# Altium PCB PCB.PcbDoc
Units mm, origin at the board's own origin, x right, y up, seen from the top; angles counter-clockwise.
Board outline 59 x 41 mm, 4 copper layers (Top Layer, (GND), (PWR), Bottom Layer), stack 1.369 mm thick; 36 components, 27 nets, 101 pads, 14 vias.
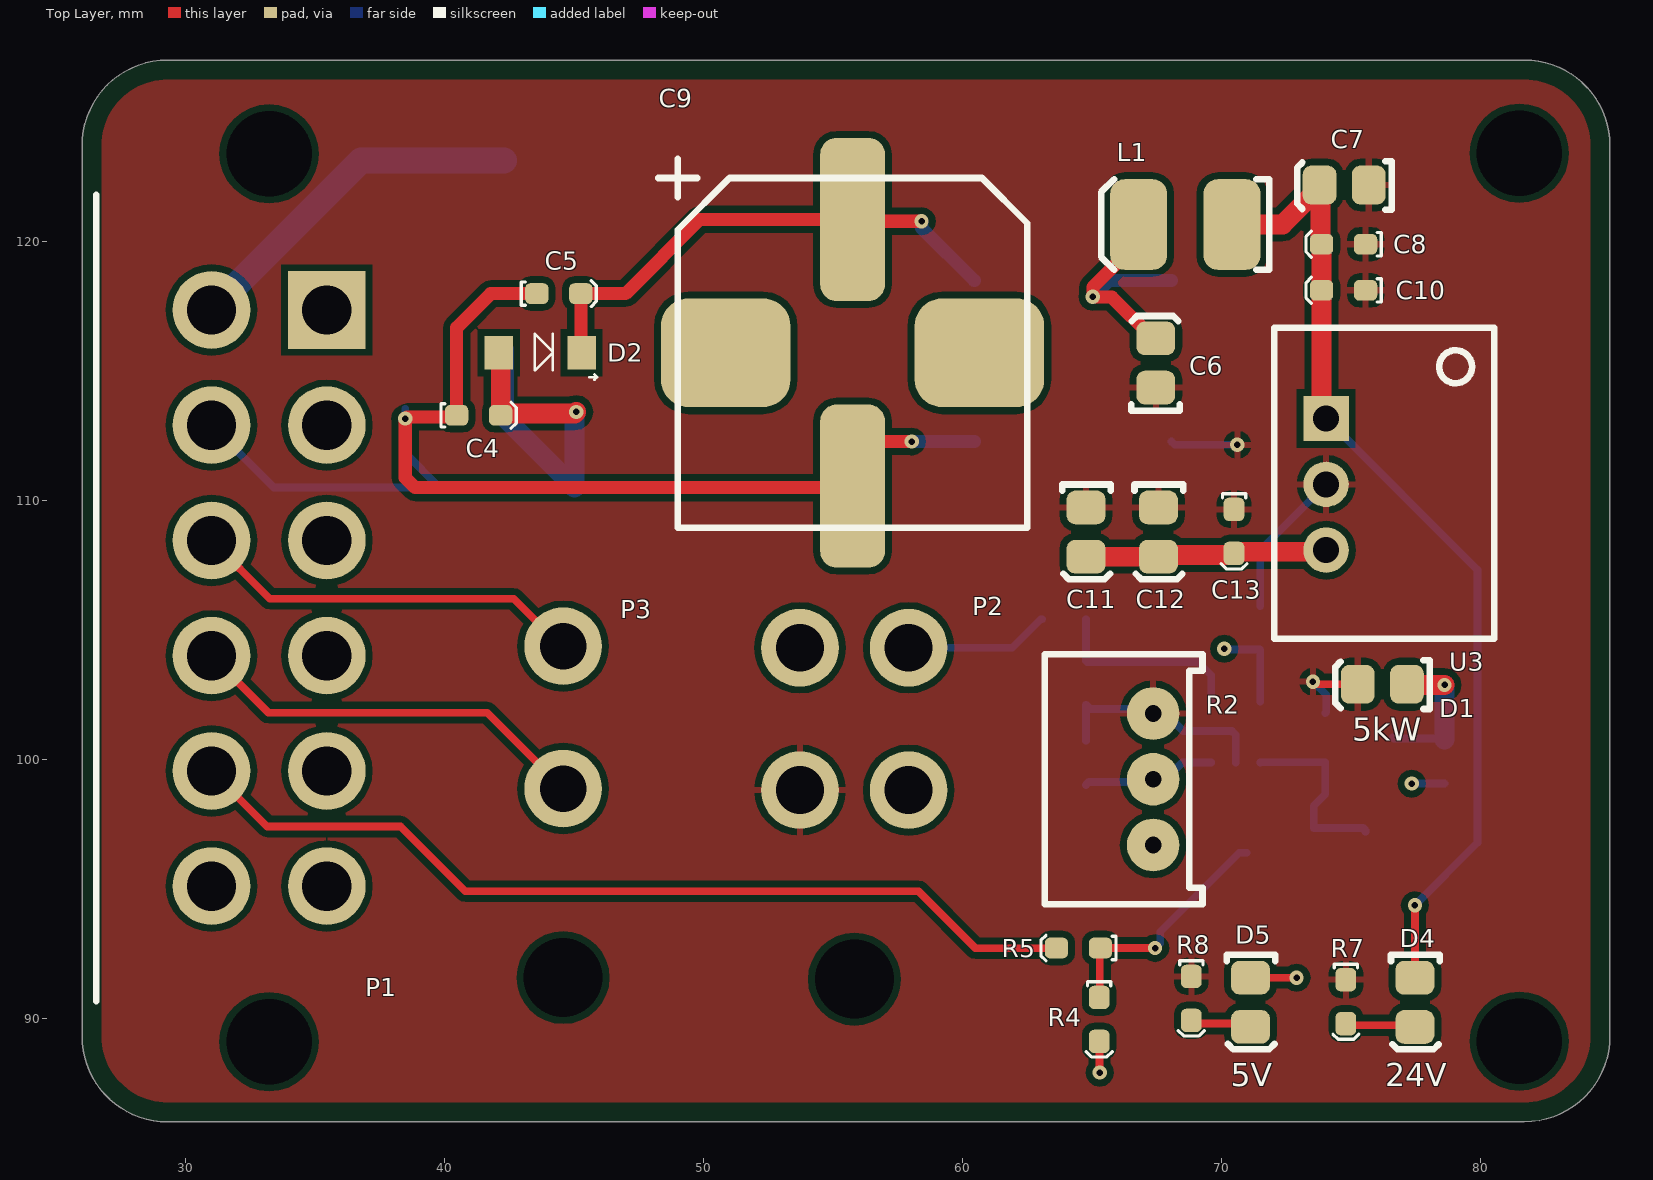
[diagram p0: Top Layer view]
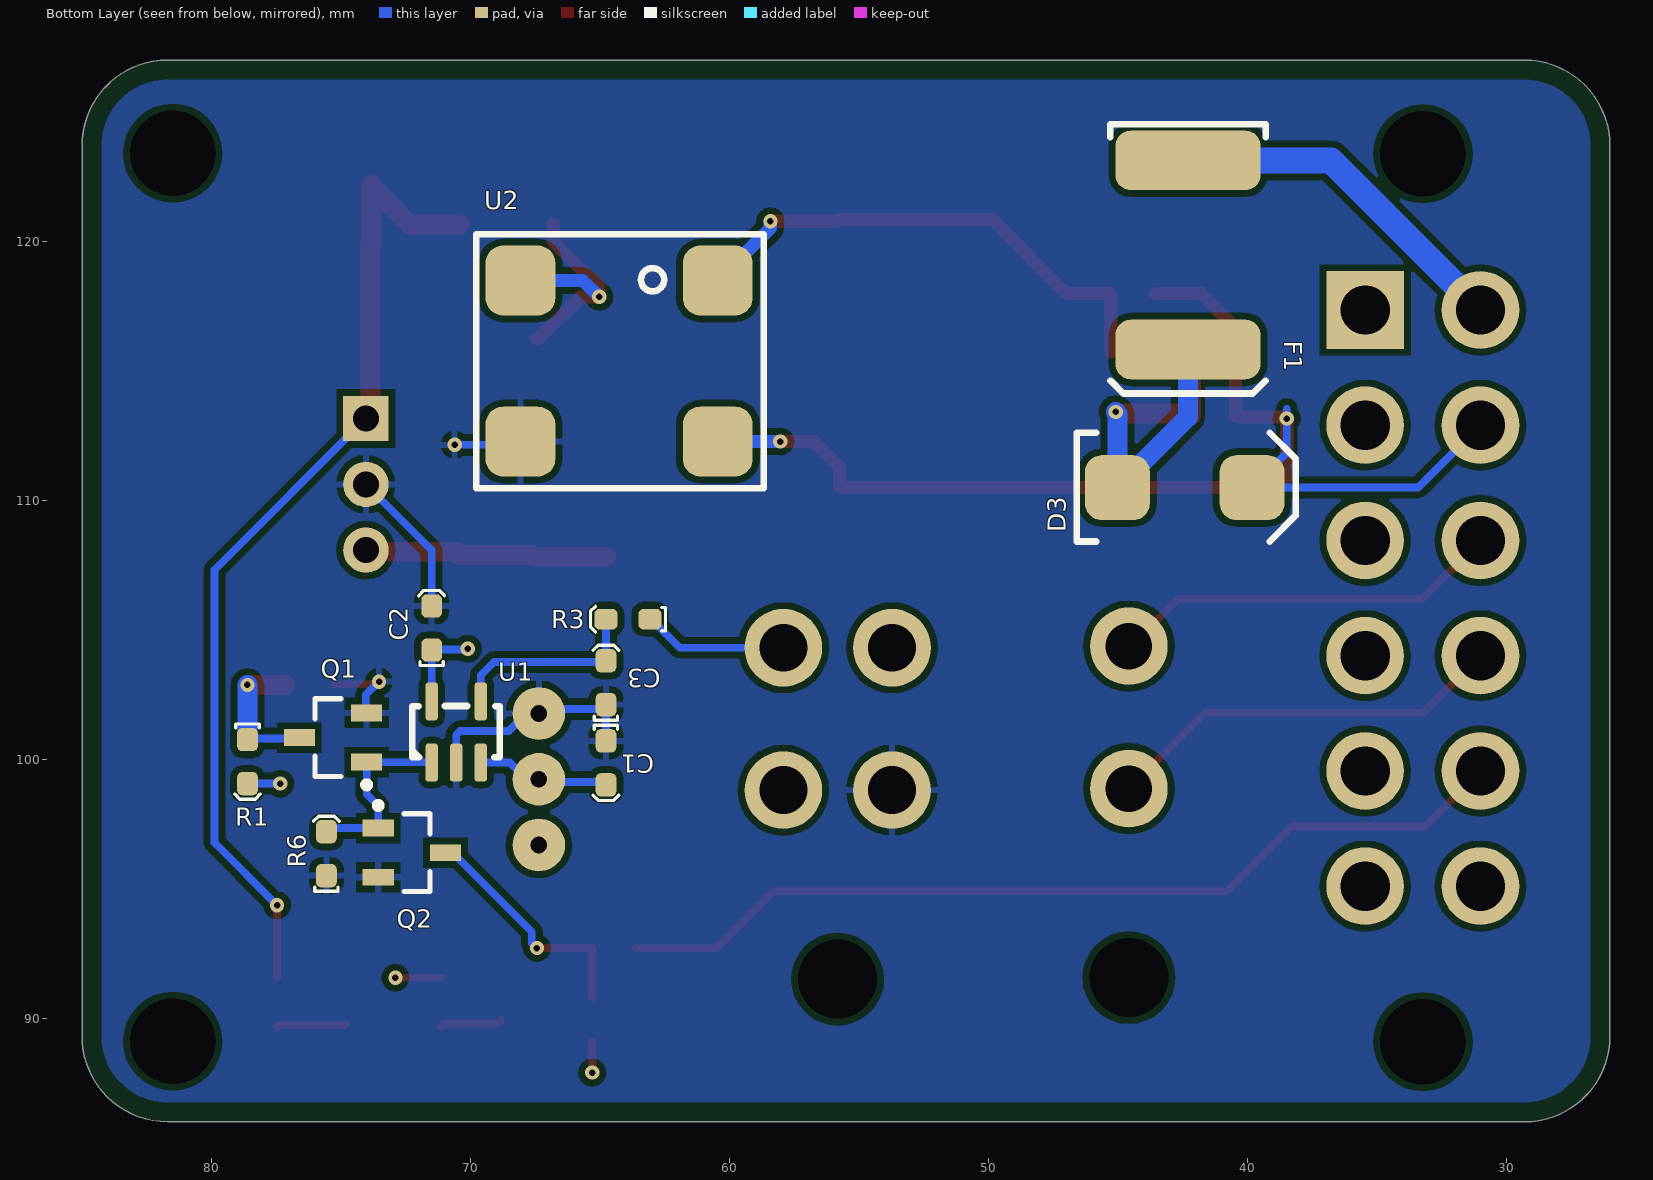
[diagram p1: Bottom Layer view, seen from below]
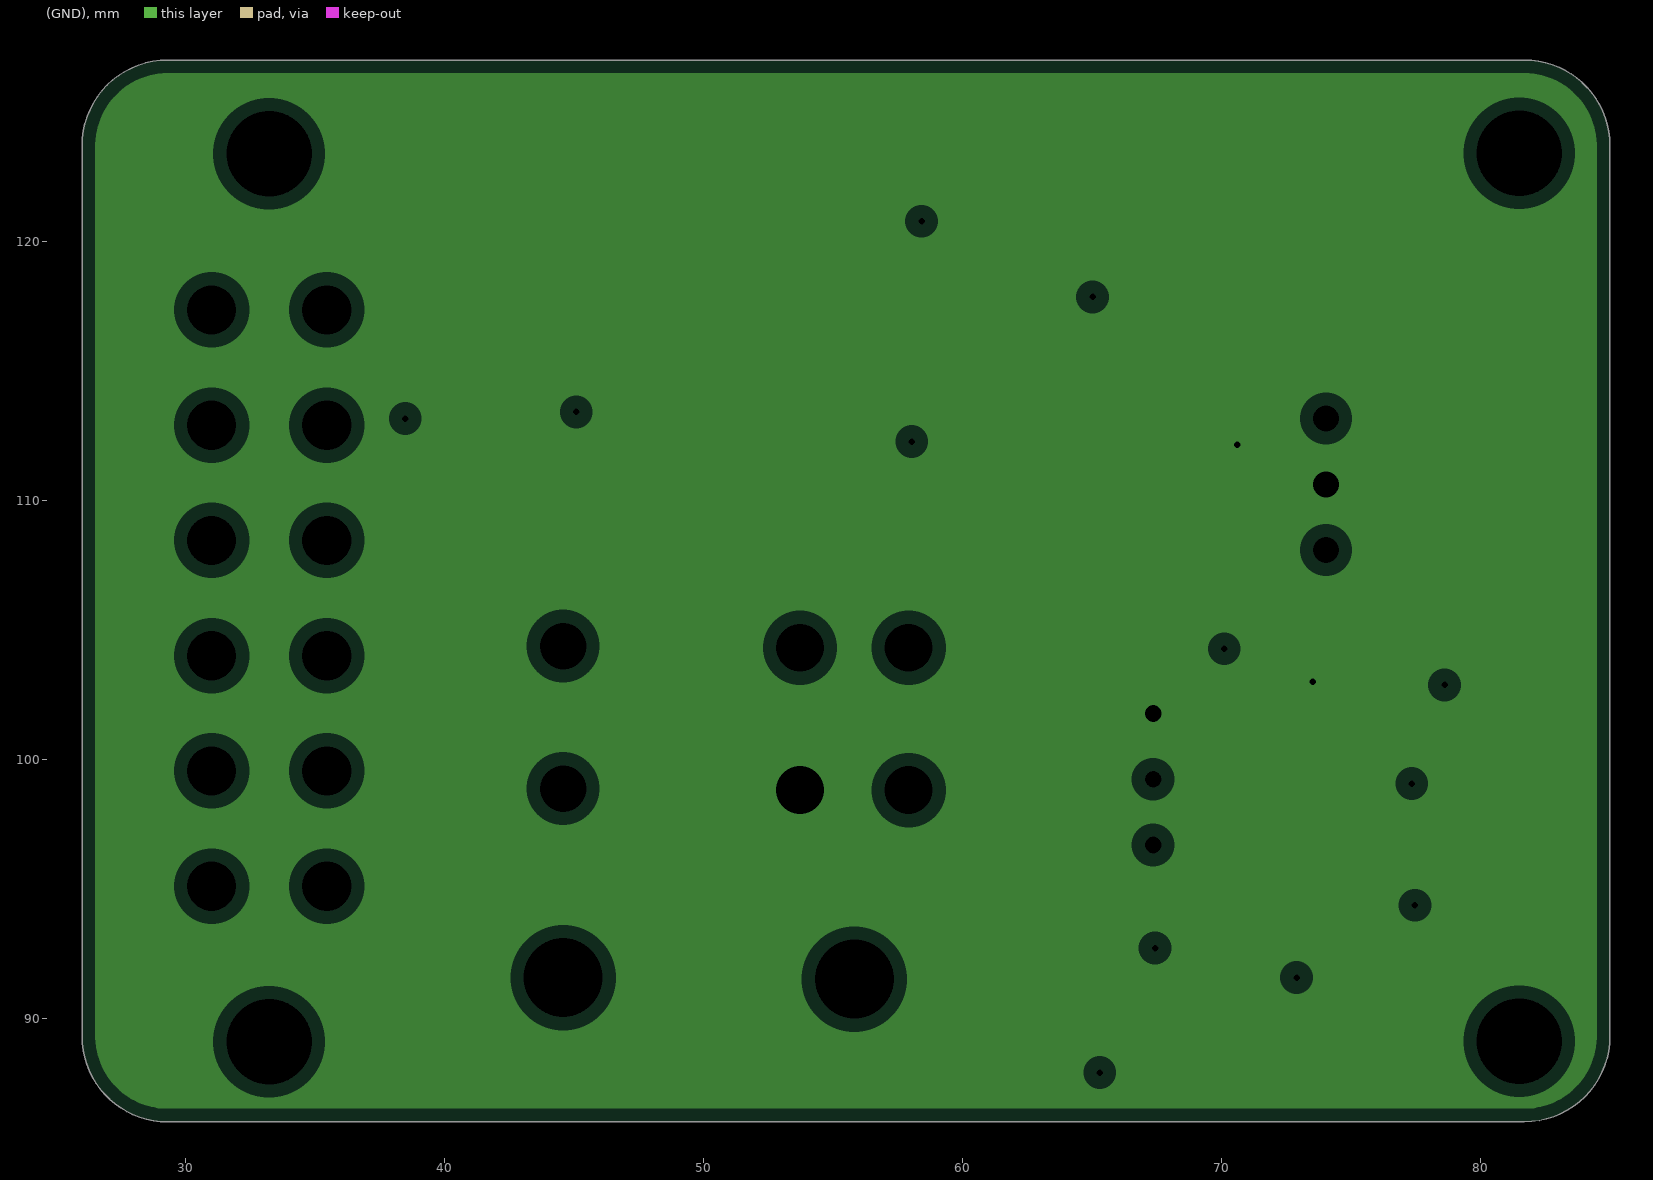
[diagram p2: (GND), clearances drawn from the general rule]
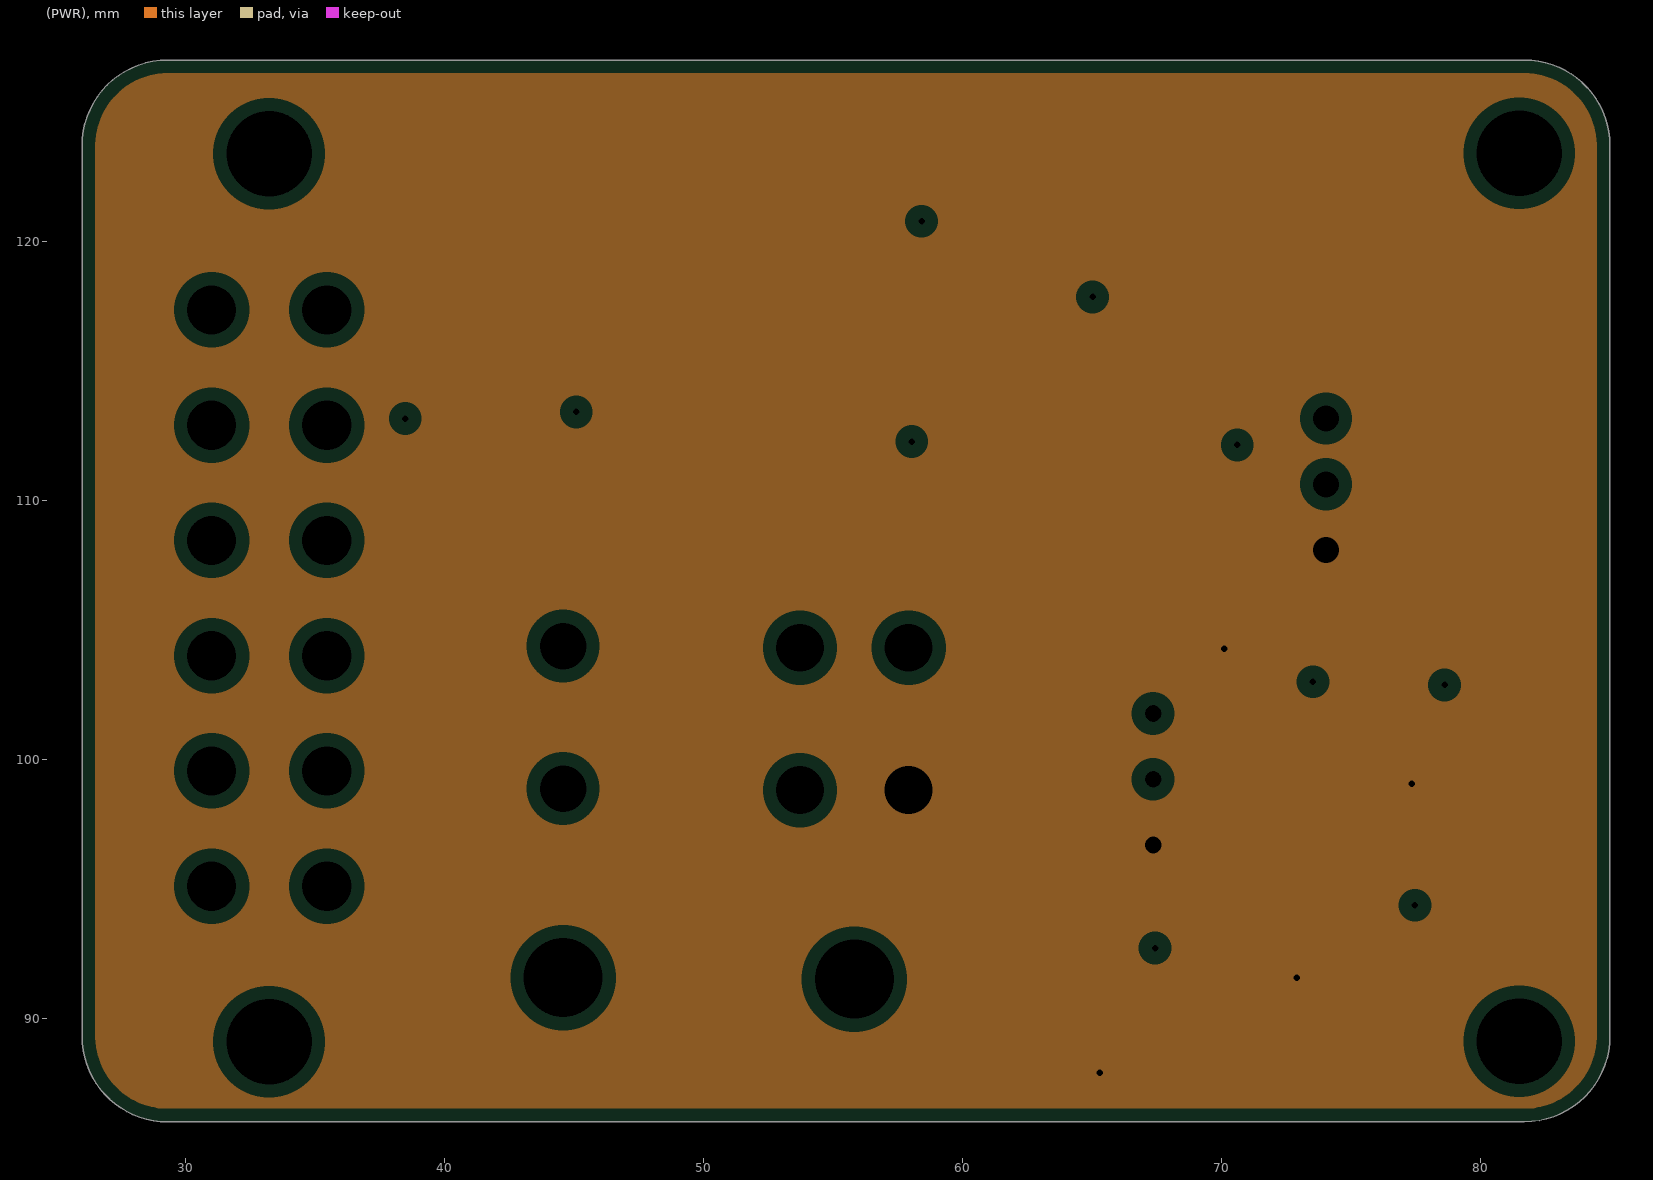
[diagram p3: (PWR), clearances drawn from the general rule]

## Layer stack, top to bottom
Top Solder: solder mask 0.0254, SM-001, Dk 4
Top Layer: signal copper 0.035
Dielectric 1: prepreg 0.1295, PP-017, Dk 4.3
Dielectric 2: prepreg 0.1295, PP-017, Dk 4.3
(GND): plane copper 0.035, net 0V
Dielectric 3: core 0.7112, Core-039, Dk 4.8
(PWR): plane copper 0.035, net 5V
Dielectric 4: prepreg 0.1295, PP-017, Dk 4.3
Dielectric 5: prepreg 0.1295, PP-017, Dk 4.3
Bottom Layer: signal copper 0.035
Bottom Solder: solder mask 0.0254, SM-001, Dk 4

## Board outline
29.3,86 cw(c29.3,89.3) 26,89.3 26,123.7 cw(c29.3,123.7) 29.3,127 81.7,127 cw(c81.7,123.7) 85,123.7 85,89.3 cw(c81.7,89.3) 81.7,86

## Design rules (kind name [scope] priority, off if disabled: settings)
BoardOutlineClearance [All] p1: gap=0.75 ignorepadtopadclearanceinfootprint=FALSE
Clearance [All] p1: gap=0.254 ignorepadtopadclearanceinfootprint=FALSE except(0: Arc-Hole Track-Hole SMDPad-Hole THPad-Hole Via-Hole Fill-Hole Poly-Hole Region-Hole Text-Hole)
HoleSize [All] p1: absolutevalues=TRUE maxlimit=4 minlimit=0.025 maxpercent=80.000 minpercent=20.000
PlaneClearance [All] p1: clearance=0.508
PlaneConnect [All] p1: planeconnectstyle=Relief reliefexpansion=0.508 reliefentries=4 reliefconductorwidth=0.254 reliefairgap=0.254
PolygonConnect [All] p1: connectstyle=Relief reliefconductorwidth=0.254 reliefentries=4 polygonreliefangle="90 Angle" airgapwidth=0.254
RoutingVias [All] p1: holewidth=0.25 width=0.55 viastyle="Through Hole" minholewidth=0.2 minwidth=0.5 maxholewidth=0.711 maxwidth=1.27
SolderMaskExpansion [All] p1: expansion=0.102 istentingtop=FALSE
Width [All] p1: maxlimit=1.27 minlimit=0.3 preferedwidth=0.3 minimp=50.000000 maximp=50.000000 favimp=50.000000
27 further rules are at their usual default settings.

## Classes and differential pairs
component class "U_Power supply": C4 C5 C6 C7 C8 C9 C10 C11 C12 C13 D2 D3 D4 D5 F1 L1 R7 R8 U2 U3
component class TopLevel: C1 C2 C3 D1 P1 P2 P3 Q1 Q2 R1 R2 R3 R4 R5 R6 U1

## Components (designator, comment, footprint, x,y, rotation, side; value= is the part's Value field where it differs from the comment)
C1 "100nF" 0603 64.77,100.711 r270 bottom
C2 "100nF" 0603 71.501,104.218 r90 bottom
C3 "10nF" 0603 64.77,102.108 r90 bottom
C4 "100nF" 0603 40.464,113.284 r0 top
C5 "100nF" 0603 43.561,117.983 r0 top
C6 "10uF" 0805 67.437,115.316 r90 top
C7 "10uF" 0805 74.725,122.148 r180 top
C8 "100nF" 0603 75.565,119.888 r180 top
C9 "220uF" "Vishay Radial 1213" 55.753,115.697 r90 top
C10 "100nF" 0603 75.565,118.11 r180 top
C11 "22uF" 0805 64.796,108.761 r270 top
C12 "1µF" 0805 67.59,108.761 r270 top
C13 "100nF" 0603 70.485,109.65 r270 top
D1 "Yellow" "0805 LED" 76.2,102.87 r180 top
D2 "PMEG100T10ELR-QX" "NXP SOD123W" 43.688,115.697 r180 top
D3 "SM6T36CAY" "ST SMB DIODE" 42.418,110.49 r0 bottom
D4 "Red" "0805 LED" 77.496,90.6 r270 top
D5 "Red" "0805 LED" 71.146,90.605 r270 top
F1 "0ZCF0100AF2A" 2920 42.291,123.124 r270 bottom
L1 "12uH" 1812 68.602,120.65 r180 top
P1 "DTF13-12P" DTF13-12P 31,106.236 r270 top
P2 "39300040" 39300040 57.921,98.806 r0 top
P3 "39300020" 39300020 44.577,98.867 r0 top
Q1 "SQ2308CES-T1_GE3" "VSHY SOT-23-3" 75.311,100.838 r0 bottom
Q2 "SQ2308CES-T1_GE3" "VSHY SOT-23-3" 72.263,96.393 r180 bottom
R1 "2K" 0603 78.613,100.76 r270 bottom
R2 "10K (Var)" "B 3296" 66.802,99.314 r90 top
R3 "10k" 0603 63.07,105.41 r0 bottom
R4 "1k" 0603 65.278,90.805 r270 top
R5 "1k" 0603 65.327,92.71 r180 top
R6 "20K" 0603 75.565,95.504 r90 bottom
R7 "20K" 0603 74.803,91.489 r270 top
R8 "2K" 0603 68.834,91.616 r270 top
U1 "TLV7031-Q1" "TI SOT-23-5" 71.501,99.873 r180 bottom
U2 "744272121" "Wurth 4-PC Pad" 68.072,112.268 r180 bottom value="120uH @ 100kHz"
U3 "R-78C5.0-1.0" "RECOM 3-SIP" 74.041,113.157 r270 top

## Footprints (in the part's own frame and the unit in brackets; to place one, negate y for a bottom-side part, rotate by r counter-clockwise, add the part's x,y. Pads: shape width x height; smd on the part's side, far side on the other; paste and mask are expansions set on the pad)
0603 [mm]
  rrect50% 0.9x0.8 smd: 1(0,0) 2(1.7,0)
  silkscreen extent -0.6,-0.5 2.3,0.5, body extent 0.05,-0.42 1.65,0.43, height 0.6
0805 [mm]
  rrect50% 1.3x1.5 smd: 1(-0.962,-0.026) 2(0.938,-0.026)
  silkscreen extent -1.85,-0.95 1.8,0.93, body extent -1,-0.65 1,0.66, height 0.73
"0805 LED" [mm]
  rrect50% 1.3x1.5 smd: A(-0.962,-0.026) K(0.938,-0.026)
  silkscreen extent -1.85,-0.95 1.8,0.93, body extent -1.1,-0.62 0.9,0.62, height 1
1812 [mm]
  rrect50% 2.2x3.5 smd: 1(-1.8,0) 2(1.8,0)
  silkscreen extent -3.25,-1.75 3.25,1.75, body extent -2.25,-1.6 2.25,1.6, height 2.5
2920 [mm]
  rrect50% 2.3x5.6 smd: 1(0,0) 2(7.3,0)
  silkscreen extent -1.4,-3 9,3, body extent -0.34,-2.81 7.64,2.81, height 1.14
39300020 [mm]
  round 3 hole 1.8: 1(0,0) 2(0,5.5)
  round 1.524 hole 3.05: ""(0,-7.3)
  body extent -2.7,-13.97 3.1,5.97, height 11.4
39300040 [mm]
  round 3 hole 1.85: 1(0,0) 2(0,5.5) 3(-4.2,0) 4(-4.2,5.5)
  round 1.524 hole 3.05: ""(-2.1,-7.3)
  body extent -6.9,-13.87 3.1,6.07, height 11.4
"B 3296" [mil]
  round 80 hole 25.2: 1(-103.39,-22) 2(-3.39,-22) 3(96.61,-22)
  silkscreen extent -193,-97 187,143, body extent -191,-97 184,143, height 455
DTF13-12P [mm]
  round 3 hole 3.3 unplated: 0(-17.145,2.22) 0(17.145,2.22)
  rect 3x3 hole 1.9: 1(-11.114,4.45)
  round 3 hole 1.9: 2(-6.664,4.45) 3(-2.214,4.45) 4(2.236,4.45) 5(6.686,4.45) 6(11.136,4.45) 7(11.136,0) 8(6.686,0) 9(2.236,0) 10(-2.214,0) 11(-6.664,0) 12(-11.114,0)
  silkscreen extent -15.56,-4.45 15.59,-4.45, body extent -20.79,-27.74 20.79,6.55, height 23.13
"NXP SOD123W" [mm]
  rect 1.1x1.3 smd: A(1.6,0) K(-1.6,0)
  silkscreen extent -2.2,-0.73 0.2,1.04, body extent -1.75,-0.95 1.75,0.95, height 1.1
"RECOM 3-SIP" [mm] "12 to 42 Vdc In, 9 Vdc Out"
  rect 1.75x1.75 hole 1: 1(0,0)
  round 1.75 hole 1: 2(2.54,0) 3(5.08,0)
  silkscreen extent -3.5,-2 8.5,6.5, body extent -3.26,-2.02 8.34,6.48, height 11.41
"ST SMB DIODE" [mm]
  rrect50% 2.5x2.5 smd: A(2.6,0) K(-2.6,0)
  silkscreen extent -4.28,-2.12 4.17,2.08, body extent -2.88,-1.99 2.72,1.95, height 2.5
"TI SOT-23-5" [mil]
  rrect50% 19x58 smd: 1(0,0) 2(37.4,0) 3(74.8,0) 4(74.8,93) 5(0,93)
  silkscreen extent -30,8 103,86, body extent -23,-12 97,106, height 57
"Vishay Radial 1213" [mm]
  rrect50% 4.2x5 smd: 0(0,4.9) 0(0,-4.9)
  rrect50% 6.3x2.5 smd: 1(-5.15,0) 2(5.15,0)
  silkscreen extent -6.75,-6.75 7.5,7.5, body extent -7.45,-6.45 7.45,6.45, height 14.31
"VSHY SOT-23-3" [mm] "SOT23, 3-Leads, Body 2.92x2.37mm, Pitch 0.95mm, IPC Low Density"
  rect 1.2x0.65 smd: D(1.3,0) G(-1.3,0.95) S(-1.3,-0.95)
  silkscreen extent -1.42,-1.5 0.7,1.95, body extent -1.32,-1.52 1.32,1.52, height 1.12
"Wurth 4-PC Pad" [mm]
  rrect50% 2.7x2.7 smd: 1(7.62,6.22) 2(0,6.22) 3(0,0) 4(7.62,0)
  silkscreen extent -1.7,-1.8 9.4,8, body extent -1.19,-1.24 8.81,7.46, height 6.2

## Part data
C1 C2 C4 C5 C8 C10 C13: library part GCM188L81H104KA57D, Digikey Part Number=490-6049-1-ND, Manufacturer=muRata, Rated Voltage=50V, Temperature Rating=X8L, Tolerance=±10%, Material=MLCC, Part Number=GCM188L81H104KA57D
C3: library part GCM188L81H103KA03D, Digikey Part Number=490-GCM188L81H103KA03DCT-ND, Manufacturer=muRata, Rated Voltage=50V, Temperature Rating=X8L, Tolerance=±10%, Material=MLCC, Part Number=GCM188L81H103KA03D
C6 C7: library part GRM21BR6YA106KE43L, Digikey Part Number=490-10514-6-ND, Manufacturer=muRata, Rated Voltage=50V, Temperature Rating=X5R, Tolerance=10%, Material=MLCC, Part Number=GRM21BR6YA106KE43L
C9: library part MAL214699106E3, Digikey Part Number=4440PHCT-ND, Manufacturer=Vishay, Rated Voltage=50V, Temperature Rating=125C, Tolerance=20%, Material="Aluminium Electrolytic", Part Number=MAL214699106E3
C11: library part GRM21BR61A226ME51L, Digikey Part Number=490-10511-1-ND, Manufacturer=muRata, Rated Voltage=10V, Temperature Rating=X5R, Tolerance=20%, Material=MLCC, Part Number=GRM21BR61A226ME51L
C12: library part GCM21BR71H105KA03L, Digikey Part Number=490-10675-1-ND, Manufacturer=muRata, Rated Voltage=50V, Temperature Rating=X7R, Tolerance=±10%, Material=MLCC, Part Number=GCM21BR71H105KA03L
D1: library part SML-211YTT86, "Yellow LED Indication - Discrete 1.75V 0805 (2012 Metric)", Digikey Part Number=511-1293-1-ND, Manufacturer="ROHM Semiconductor", Colour=Yellow, Part Number=SML-211YTT86
D2: Breakdown Voltage="100 V", Digikey Part Number=1727-PMEG100T10ELR-QXCT-ND, Forward Voltage="0.75 V @ 1A", Manufacturer="Nexperia USA Inc.", Rated Power="680 mW", Part Number=PMEG100T10ELR-QX
D3: Breakdown Voltage="30.8 V", Digikey Part Number=497-10804-1-ND, Manufacturer=STMicroelectronics, Rated Power=600W, Forward Voltage="30.8 V", Part Number=SM6T36CAY
D4 D5: library part SML-210LTT86, "Red LED Indication - Discrete 1.75V 0805 (2012 Metric)", Digikey Part Number=511-1286-1-ND, Manufacturer="ROHM Semiconductor", Colour=Red, Part Number=SML-210LTT86
F1: "PTC RESET FUSE 60V 1A 292", Digikey Part Number=507-2070-1-ND, Manufacturer="Littelfuse Inc.", Digikey Link=https://www.digikey.com/product-detail/en/bel-fuse-inc/0ZCF0100AF2A/507-2070-1-ND/6210547, Part Number=0ZCF0100AF2A
L1: library part RLS-126, Digikey Part Number=945-3429-ND, Manufacturer=Recom, Rated Current="0.8 A", Tolerance=0.2, Impedance=230mOhm, Material=Wirewound, Part Number=RLS-126
P1: Digikey Part Number=1734-1861-ND, Angle=90, Contact="Copper Alloy", Digikey Link=https://www.digikey.com/products/en?keywords=dtf13-12pa, Flange=No, Part Number=DTF13-12P, Pitch=4.45mm, Positions=12, Row Spacing=4.45mm
P2: Digikey Part Number=WM21352-ND, Angle=90, Contact=Tin, Flange=No, Part Number=39300040, Pitch=4.2mm, Positions=4, Row Spacing=5.5mm
P3: Digikey Part Number=WM21351-ND, Angle=90, Contact=Tin, Flange=No, Part Number=39300020, Pitch=4.2mm, Positions=2, Row Spacing=5.5mm
Q1 Q2: "MOSFET N-CH 60V 2.3A SOT23", Digikey Part Number=SQ2308CES-T1_GE3CT-ND, Manufacturer="Vishay Siliconix", Rated Power=2W, LatestRevisionDate=29-May-2009, LatestRevisionNote="IPC-7351 Footprint Added.", PackageDescription="4-Pin SOT-343 Package 1.3 mm Pitch, 2.1 mm Lead Span", PackageReference=SOT-343, PackageVersion=Sep-2000, Part Number=SQ2308CES-T1_GE3, Published=24-Mar-1999, Publisher="Altium Limited", Type=N-channel
R1 R8: library part RC0603FR-072KL, Digikey Part Number=311-2.00KHRCT-ND, Manufacturer=YAGEO, Rated Power=0.1W, Tolerance=0.01, Part Number=RC0603FR-072KL
R2: library part 3296W-1-103LF, Digikey Part Number=3296W-103LF-ND, Manufacturer="Bournes Inc", Rated Power=0.5W, Tolerance=0.1, Part Number=3296W-1-103LF
R3: library part RC0603FR-0710KL, Digikey Part Number=311-10.0KHRCT-ND, Manufacturer=YAGEO, Rated Power=0.1W, Tolerance=0.01, Part Number=RC0603FR-0710KL
R4 R5: library part RC0603FR-071KL, Digikey Part Number=311-1.00KHRCT-ND, Manufacturer=YAGEO, Rated Power=0.1W, Tolerance=0.01, Part Number=RC0603FR-071KL
R6 R7: library part RC0603FR-0720KL, Digikey Part Number=311-20.0KHRCT-ND, Manufacturer=YAGEO, Rated Power=0.1W, Tolerance=0.01, Part Number=RC0603FR-0720KL
U1: Digikey Part Number=296-TLV7031QDBVRQ1CT-ND, Input Voltage="1.6 to 6.5 V", Manufacturer="Texas Instruments", Channels=1, Output=Push-Pull, Part Number=TLV7031-Q1
U2: Digikey Part Number=732-1489-1-ND, Manufacturer="Wurth Electronics Inc", Rated Current="2.5 A", Impedance="460 Ohms @ 30MHz", Material=Wirewound, Part Number=744272121
U3: "CONV DC/DC 1A 5V OUT SIP VERT", Digikey Part Number=945-1395-5-ND, Input Voltage="8 to 42 V", Manufacturer=Recom, Output Current="1.0 A", Output Voltage=5V, Part Number=R-78C5.0-1.0

## Free pads (board coordinates)
  round 1.524 hole 3.3: 1(81.5,89.114) 1(81.5,123.404)

## Via types
v1: diameter 0.55, hole 0.25, Top Layer to Bottom Layer, 14 vias

## Nets (pads, with @x,y where several pads share a name; then routed paths per layer and width w, separated by ;. In a path a pad name is that pad's centre, name@x,y a point inside that pad or via, vN(x,y) a via of type N, cw(c..) or ccw(c..) an arc to the next point about the centre after c; other vN are vias at no path point)
0V: C1.1 C2.2 C3.1 C6.1 C7.1 C8.1 C10.1 C11.1 C12.1 C13.1 D1.K P2.3 Q1.S Q2.S R2.3 R6.1 R7.1 R8.1 U1.2 U2.3 U3.2 | length 20.3
  Top Layer w0.3: v1(73.533,102.997) 73.613,102.997 73.714,102.896 D1.K
  Bottom Layer w0.3: C1.1 C3.1 64.94,101.938 67.191,101.938 R2.3 67.842,101.768 68.518,101.092 70.402,101.092 70.551,100.943 U1.2 ; U2.3 68.199,112.141 v1(70.612,112.141) ; C2.2 71.501,108.077 U3.2 ; v1(73.533,102.997) 74.041,102.489 74.041,101.818 Q1.S
5kW: P1.8 R5.2 | length 35.5
  Top Layer w0.3: P1.8 33.15,97.4 38.3,97.4 40.8,94.9 58.3,94.9 60.5,92.7 63.617,92.7 R5.2
5V: C2.1 C11.2 C12.2 C13.2 D5.A P2.1 R1.2 R2.1 R4.2 U1.5 U3.3 | length 17
  Top Layer w0.3: R4.2 65.289,89.094 65.289,87.911 v1(65.3,87.9) ; D5.A v1(72.898,91.567)
  Top Layer w0.762: C11.2 C12.2 67.627,107.886 70.421,107.886 C13.2 70.549,108.013 73.977,108.013 U3.3
  Bottom Layer w0.3: v1(70.104,104.267) 70.128,104.243 71.476,104.243 C2.1 U1.5 ; v1(77.343,99.06) R1.2
24V: C7.2 C8.2 C10.2 D4.A L1.1 U3.1 | length 38.2
  Top Layer w0.3: D4.A v1(77.47,94.361)
  Top Layer w0.762: L1.1 72.363,120.65 73.787,122.074 C7.2 73.826,122.135 73.826,119.927 C8.2 C10.2 73.865,113.333 U3.1
  Bottom Layer w0.3: U3.1 79.883,107.315 79.883,96.774 v1(77.47,94.361)
CAN1H: P1.5
CAN1L: P1.4
CAN2H: P1.7
CAN2L: P1.6
CAN3H: P1.3
CAN3L: P1.2
CANS: P1.1
GLV+: F1.1 P1.12 | length 13.7
  Bottom Layer w1: P1.12 36.774,123.124 F1.1
GLV-: C4.1 C5.1 C9.1 D3.K P1.11 U2.4 | length 48.1
  Top Layer w0.508: C5.1 41.783,117.983 40.464,116.664 C4.1 40.401,113.221 38.544,113.221 v1(38.481,113.157) 38.481,110.871 38.862,110.49 55.696,110.49 C9.1 55.753,111.3 56.721,112.268 v1(58.039,112.268)
  Bottom Layer w0.3: P1.11 33.41,110.49 D3.K 38.481,111.827 v1(38.481,113.157) 38.481,113.538
  Bottom Layer w0.508: v1(58.039,112.268) U2.4
"Green In": P1.10 P3.2 | length 15.3
  Top Layer w0.3: P1.10 33.25,106.2 42.672,106.2 44.505,104.367 P3.2
"Green Out": P1.9 P3.1 | length 15.7
  Top Layer w0.3: P1.9 33.2,101.8 41.644,101.8 P3.1
"High Sensitivity": P2.2 R3.1 | length 5.6
  Bottom Layer w0.3: P2.2 61.916,104.306 63.02,105.41 R3.1
"Low Sensitivity": P2.4
NetC1_2: C1.2 R2.2 U1.3 | length 5.2
  Bottom Layer w0.3: C1.2 64.878,99.119 67.252,99.119 R2.2 67.842,99.228 68.487,99.873 U1.3
NetC3_2: C3.2 R3.2 U1.4 | length 7.7
  Bottom Layer w0.3: R3.2 C3.2 64.819,103.759 69.088,103.759 69.601,103.246 U1.4
NetC4_2: C4.2 D2.A D3.A F1.2 | length 14.8
  Top Layer w0.3: C4.2 C4.2@42.227,113.347
  Top Layer w0.762: D2.A 42.164,115.621 C4.2 ; C4.2@42.227,113.347 45.021,113.347 v1(45.085,113.411)
  Bottom Layer w0.762: F1.2 42.291,113.217 D3.A 45.018,113.344 v1(45.085,113.411)
NetC5_2: C5.2 C9.2 D2.K U2.1 | length 19.8
  Top Layer w0.3: D2.K@45.261,115.724 D2.K
  Top Layer w0.508: D2.K@45.261,115.724 C5.2 46.99,117.983 49.854,120.847 C9.2 55.823,120.777 v1(58.42,120.777)
  Bottom Layer w0.508: v1(58.42,120.777) 58.428,120.769 58.428,120.512 U2.1
NetC6_2: C6.2 L1.2 U2.2 | length 9.9
  Top Layer w0.508: L1.2 66.802,120 65.032,118.23 65.032,117.864 v1(65.024,117.856) 65.032,117.848 65.769,117.848 67.363,116.254 C6.2
  Bottom Layer w0.508: v1(65.024,117.856) 65.035,117.856 65.667,118.488 U2.2
NetD1_A: D1.A Q1.D R1.1 | length 5.6
  Top Layer w0.762: D1.A 77.188,102.87 v1(78.613,102.87)
  Bottom Layer w0.3: Q1.D 76.65,100.799 78.574,100.799 R1.1
  Bottom Layer w0.762: R1.1 v1(78.613,102.87)
NetD4_K: D4.K R7.2 | length 2.7
  Top Layer w0.3: R7.2 74.867,89.725 77.406,89.725 D4.K
NetD5_K: D5.K R8.2 | length 2.4
  Top Layer w0.3: R8.2 68.958,89.792 70.996,89.792 D5.K
NetQ1_G: Q1.G Q2.G R6.2 U1.1 | length 7.3
  Bottom Layer w0.3: U1.1 71.516,99.888 Q1.G 74.011,98.649 73.563,98.201 Q2.G 75.476,97.343 75.565,97.254 R6.2
NetQ2_D: Q2.D R4.1 R5.1 | length 9.3
  Top Layer w0.3: R4.1 65.302,90.829 65.302,92.685 R5.1 v1(67.437,92.71)
  Bottom Layer w0.3: v1(67.437,92.71) 67.631,92.904 67.631,93.336 70.688,96.393 Q2.D
pads on no net: C9.0 P1.0 P2. P3.

## Polygon pours and split planes (outlines as drawn)
0V on Bottom Layer "0V_L04_P001" (solid, remove dead copper, pour order 1): 26,127 26,86 85,86 85,127
0V on Top Layer "0V_L01_P000" (solid, remove dead copper, pour order 0): 26,127 85,127 85,86 26,86
5V on (PWR) (split plane): 29.3,126.49 81.7,126.49 81.715,126.491 81.919,126.483 82.137,126.457 82.352,126.414 82.563,126.355 82.768,126.279 82.967,126.187 83.159,126.08 83.341,125.958 83.513,125.823 83.674,125.674 83.823,125.513 83.958,125.341 84.08,125.159 84.187,124.967 84.279,124.768 84.355,124.563 84.414,124.352 84.457,124.137 84.483,123.919 84.491,123.715 84.49,123.7 84.49,89.3 84.491,89.285 84.483,89.081 84.457,88.863 84.414,88.648 84.355,88.437 84.279,88.232 84.187,88.033 84.08,87.841 83.958,87.659 83.823,87.487 83.674,87.326 83.513,87.177 83.341,87.042 83.159,86.92 82.967,86.813 82.768,86.721 82.563,86.645 82.352,86.586 82.137,86.543 81.919,86.517 81.715,86.509 81.7,86.51 29.3,86.51 29.285,86.509 29.081,86.517 28.863,86.543 28.648,86.586 28.437,86.645 28.232,86.721 28.033,86.813 27.841,86.92 27.659,87.042 27.487,87.177 27.326,87.326 27.177,87.487 27.042,87.659 26.92,87.841 26.813,88.033 26.721,88.232 26.645,88.437 26.586,88.648 26.543,88.863 26.517,89.081 26.509,89.285 26.51,89.3 26.51,123.7 26.509,123.715 26.517,123.919 26.543,124.137 26.586,124.352 26.645,124.563 26.721,124.768 26.813,124.967 26.92,125.159 27.042,125.341 27.177,125.513 27.326,125.674 27.487,125.823 27.659,125.958 27.841,126.08 28.033,126.187 28.232,126.279 28.437,126.355 28.648,126.414 28.863,126.457 29.081,126.483 29.285,126.491
0V on (GND) (split plane): 29.3,126.49 81.7,126.49 81.715,126.491 81.919,126.483 82.137,126.457 82.352,126.414 82.563,126.355 82.768,126.279 82.967,126.187 83.159,126.08 83.341,125.958 83.513,125.823 83.674,125.674 83.823,125.513 83.958,125.341 84.08,125.159 84.187,124.967 84.279,124.768 84.355,124.563 84.414,124.352 84.457,124.137 84.483,123.919 84.491,123.715 84.49,123.7 84.49,89.3 84.491,89.285 84.483,89.081 84.457,88.863 84.414,88.648 84.355,88.437 84.279,88.232 84.187,88.033 84.08,87.841 83.958,87.659 83.823,87.487 83.674,87.326 83.513,87.177 83.341,87.042 83.159,86.92 82.967,86.813 82.768,86.721 82.563,86.645 82.352,86.586 82.137,86.543 81.919,86.517 81.715,86.509 81.7,86.51 29.3,86.51 29.285,86.509 29.081,86.517 28.863,86.543 28.648,86.586 28.437,86.645 28.232,86.721 28.033,86.813 27.841,86.92 27.659,87.042 27.487,87.177 27.326,87.326 27.177,87.487 27.042,87.659 26.92,87.841 26.813,88.033 26.721,88.232 26.645,88.437 26.586,88.648 26.543,88.863 26.517,89.081 26.509,89.285 26.51,89.3 26.51,123.7 26.509,123.715 26.517,123.919 26.543,124.137 26.586,124.352 26.645,124.563 26.721,124.768 26.813,124.967 26.92,125.159 27.042,125.341 27.177,125.513 27.326,125.674 27.487,125.823 27.659,125.958 27.841,126.08 28.033,126.187 28.232,126.279 28.437,126.355 28.648,126.414 28.863,126.457 29.081,126.483 29.285,126.491

## Silkscreen, mask and mechanical layers (free items; w line width, h text height)
Top Overlay:
  text "5kW" at 75.057,100.711 h0.89
  text "5V" at 70.358,87.376 h0.89
  text "24V" at 76.327,87.376 h0.89
Mechanical 1:
  the board outline again, w0.1
Drill Drawing:
  circle w0.254: c0.37,170.501 r0.508
  circle w0.254: c0.37,170.501 r0.847
  circle w0.254: c0.37,155.261 r0.847
  lines w0.254: -0.476,150.604 1.217,150.604 1.217,152.297 -0.476,152.297 -0.476,150.604 ; -0.476,158.647 -0.053,158.647 0.37,158.224 0.794,158.647 1.217,158.647 0.794,159.071 1.217,159.494 0.794,159.494 0.37,159.917 -0.053,159.494 -0.476,159.494 -0.053,159.071 -0.476,158.647 ; -0.476,162.034 1.217,162.034 1.217,163.727 -0.476,163.727 -0.476,162.034 ; -0.476,165.844 -0.476,166.267 -0.053,166.691 -0.476,167.114 -0.476,167.537 -0.053,167.537 0.37,167.114 0.794,167.537 1.217,167.537 1.217,167.114 0.794,166.691 1.217,166.267 1.217,165.844 0.794,165.844 0.37,166.267 -0.053,165.844 -0.476,165.844 ; -0.476,175.157 1.217,175.157 0.37,173.464 -0.476,175.157 ; -0.476,177.274 0.37,177.697 1.217,177.274 0.794,178.121 1.217,178.967 0.37,178.544 -0.476,178.967 -0.053,178.121 -0.476,177.274 ; -0.476,181.507 -0.053,181.507 -0.053,181.084 0.794,181.084 0.794,181.507 1.217,181.507 1.217,182.354 0.794,182.354 0.794,182.777 -0.053,182.777 -0.053,182.354 -0.476,182.354 -0.476,181.507 ; -0.138,150.943 0.878,150.943 0.878,151.959 -0.138,151.959 -0.138,150.943
  lines w0.381: -1.995,149.461 265.494,149.461 ; -1.995,183.751 265.494,183.751 ; 11.997,145.651 11.997,187.561 ; 25.71,145.651 25.71,187.561 ; 54.911,145.651 54.911,187.561 ; 67.76,145.651 67.76,187.561 ; 86.399,145.651 86.399,187.561 ; 124.487,145.651 124.487,187.561 ; 139.47,145.651 139.47,187.561 ; 158.413,145.651 158.413,187.561 ; 174.918,145.651 174.918,187.561 ; 196.604,145.651 196.604,187.561 ; 230.478,145.651 230.478,187.561 ; -1.995,145.651 265.494,145.651 265.494,187.561 -1.995,187.561 -1.995,145.651
  text "Symbol" at 0.291,184.894 h1.83
  text "Count" at 13.14,184.894 h1.83
  text "Hole Size" at 26.853,184.894 h1.83
  text "Plated" at 56.054,184.894 h1.83
  text "Hole Type" at 68.903,184.894 h1.83
  text "Drill Layer Pair" at 87.542,184.894 h1.83
  text "Via/Pad" at 125.63,184.894 h1.83
  text "Pad Shape" at 140.613,184.894 h1.83
  text "Template" at 159.556,184.894 h1.83
  text "Description" at 176.061,184.894 h1.83
  text "Hole Tolerance (+)" at 197.747,184.894 h1.83
  text "Hole Tolerance (-)" at 231.621,184.894 h1.83
  text "2" at 13.14,181.084 h1.52
  text "70.87mil (1.800mm)" at 26.853,181.084 h1.52
  text "PTH" at 56.054,181.084 h1.52
  text "Round" at 68.903,181.084 h1.52
  text "Top Layer - Bottom Layer" at 87.542,181.084 h1.52
  text "Pad" at 125.63,181.084 h1.52
  text "Rounded" at 140.613,181.084 h1.52
  text "c300h180" at 159.556,181.084 h1.52
  text "2" at 13.14,177.274 h1.52
  text "120.08mil (3.050mm)" at 26.853,177.274 h1.52
  text "PTH" at 56.054,177.274 h1.52
  text "Round" at 68.903,177.274 h1.52
  text "Top Layer - Bottom Layer" at 87.542,177.274 h1.52
  text "Pad" at 125.63,177.274 h1.52
  text "Rounded" at 140.613,177.274 h1.52
  text "c152h305" at 159.556,177.274 h1.52
  text "2" at 13.14,173.464 h1.52
  text "129.92mil (3.300mm)" at 26.853,173.464 h1.52
  text "NPTH" at 56.054,173.464 h1.52
  text "Round" at 68.903,173.464 h1.52
  text "Top Layer - Bottom Layer" at 87.542,173.464 h1.52
  text "Pad" at 125.63,173.464 h1.52
  text "Rounded" at 140.613,173.464 h1.52
  text "c300hn330" at 159.556,173.464 h1.52
  text "2" at 13.14,169.654 h1.52
  text "129.92mil (3.300mm)" at 26.853,169.654 h1.52
  text "PTH" at 56.054,169.654 h1.52
  text "Round" at 68.903,169.654 h1.52
  text "Top Layer - Bottom Layer" at 87.542,169.654 h1.52
  text "Pad" at 125.63,169.654 h1.52
  text "Rounded" at 140.613,169.654 h1.52
  text "c152h330" at 159.556,169.654 h1.52
  text "3" at 13.14,165.844 h1.52
  text "25.20mil (0.640mm)" at 26.853,165.844 h1.52
  text "PTH" at 56.054,165.844 h1.52
  text "Round" at 68.903,165.844 h1.52
  text "Top Layer - Bottom Layer" at 87.542,165.844 h1.52
  text "Pad" at 125.63,165.844 h1.52
  text "Rounded" at 140.613,165.844 h1.52
  text "c203h64" at 159.556,165.844 h1.52
  text "3" at 13.14,162.034 h1.52
  text "39.37mil (1.000mm)" at 26.853,162.034 h1.52
  text "PTH" at 56.054,162.034 h1.52
  text "Round" at 68.903,162.034 h1.52
  text "Top Layer - Bottom Layer" at 87.542,162.034 h1.52
  text "Pad" at 125.63,162.034 h1.52
  text "(Mixed)" at 140.613,162.034 h1.52
  text "(Mixed)" at 159.556,162.034 h1.52
  text "4" at 13.14,158.224 h1.52
  text "72.84mil (1.850mm)" at 26.853,158.224 h1.52
  text "PTH" at 56.054,158.224 h1.52
  text "Round" at 68.903,158.224 h1.52
  text "Top Layer - Bottom Layer" at 87.542,158.224 h1.52
  text "Pad" at 125.63,158.224 h1.52
  text "Rounded" at 140.613,158.224 h1.52
  text "c300h185" at 159.556,158.224 h1.52
  text "12" at 13.14,154.414 h1.52
  text "74.80mil (1.900mm)" at 26.853,154.414 h1.52
  text "PTH" at 56.054,154.414 h1.52
  text "Round" at 68.903,154.414 h1.52
  text "Top Layer - Bottom Layer" at 87.542,154.414 h1.52
  text "Pad" at 125.63,154.414 h1.52
  text "(Mixed)" at 140.613,154.414 h1.52
  text "(Mixed)" at 159.556,154.414 h1.52
  text "14" at 13.14,150.604 h1.52
  text "9.84mil (0.250mm)" at 26.853,150.604 h1.52
  text "PTH" at 56.054,150.604 h1.52
  text "Round" at 68.903,150.604 h1.52
  text "Top Layer - Bottom Layer" at 87.542,150.604 h1.52
  text "Via" at 125.63,150.604 h1.52
  text "Rounded" at 140.613,150.604 h1.52
  text "(Mixed)" at 159.556,150.604 h1.52
  text "44 Total" at 13.14,146.794 h1.52
  text "FABRICATION NOTES" at 107.959,133.272 h3
  text "1. QUANTITY: 5" at 107.959,128.176 h3
  text "2. SIZE:" at 107.959,123.079 h3
  text "3. LAYERS: 4" at 107.959,117.983 h3
  text "4. SIGNAL LAYERS: 1,4" at 107.959,113.886 h3
  text "a) WEIGHT: 2oz" at 112.959,107.79 h3
  text "5. PLANES: 2" at 107.959,102.694 h3
  text "a) WEIGHT: 2oz" at 112.959,97.597 h3
  text "6. SOLDER MASKS: Blue" at 107.959,92.501 h3
  text "7. SILKSCREEN: White" at 107.959,87.404 h3
  text "8. SURFACE FINISH: Gold" at 107.959,82.308 h3
  text "9. TOTAL THICKNESS: 1.6mm" at 107.9,77.2 h3

## Dimensions
29.3,127 to 29.3,86 on Drill Drawing
26,123.7 to 85,123.7 on Drill Drawing